# Altium PCB round-small.PcbDoc
Units mm, origin at the board's own origin, x right, y up, seen from the top; angles counter-clockwise.
Board outline 11 x 11 mm, 2 copper layers (Top Layer, Bottom Layer); 25 components, 17 nets, 63 pads, 14 vias.
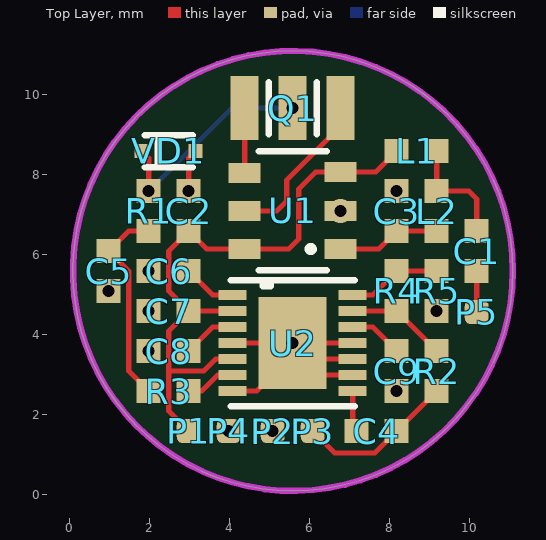
[diagram p0: Top Layer view]
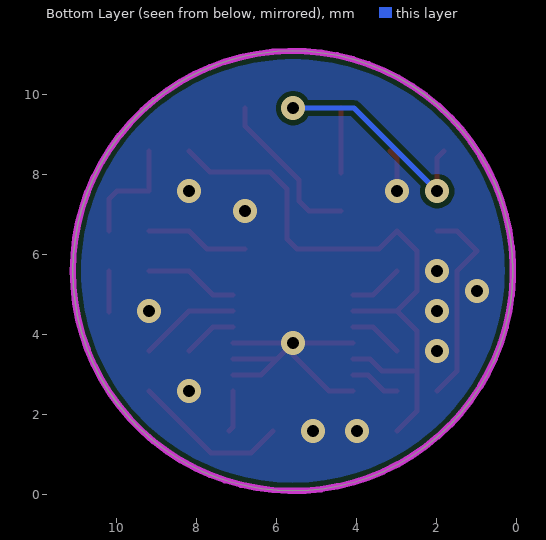
[diagram p1: Bottom Layer view, seen from below]

## Layer stack, top to bottom
Top Solder: solder mask 0.0102, Solder Resist, Dk 3.5
Top Layer: signal copper 0.0356
Dielectric 1: dielectric 0.32, FR-4, Dk 4.8
Bottom Layer: signal copper 0.0356
Bottom Solder: solder mask 0.0102, Solder Resist, Dk 3.5

## Board outline
5.58,0.08 cw(c5.58,5.58) 0.08,5.58 cw(c5.58,5.58) 5.58,11.08 cw(c5.58,5.58) 11.08,5.58 cw(c5.58,5.58)

## Design rules (kind name [scope] priority, off if disabled: settings)
Clearance [All] p1: gap=0.127 ignorepadtopadclearanceinfootprint=FALSE except(0: Arc-Hole Track-Hole SMDPad-Hole THPad-Hole Via-Hole Fill-Hole Poly-Hole Region-Hole Text-Hole)
ComponentClearance [All] p1: gap=0.01 collisioncheckmode=3 verticalgap=0.01 showdistances=FALSE
HoleSize [All] p1: absolutevalues=TRUE maxlimit=6.3 minlimit=0.2 maxpercent=80.000 minpercent=20.000
MinimumSolderMaskSliver [All] p1: minsoldermaskwidth=0.01
PolygonConnect [All] p1: connectstyle=Direct reliefconductorwidth=0.254 reliefentries=4 polygonreliefangle="90 Angle" airgapwidth=0.254
RoutingCorners [All] p1: cornerstyle=90-Degree minsetback=2.54 maxsetback=2.54
RoutingTopology [All] p1: topology=Horizontal
RoutingVias [All] p1: holewidth=0.2 width=0.5 viastyle="Through Hole" minholewidth=0.2 minwidth=0.45 maxholewidth=6.3 maxwidth=6.35
SilkToSilkClearance [All] p1: silktosilkclearance=0.1
SilkToSolderMaskClearance [IsPad] p1: minsilkscreentomaskgap=0.1 clearancetoexposedcopper=TRUE
SolderMaskExpansion [All] p1: expansion=0.102 istentingtop=FALSE
Width [All] p1: maxlimit=10 minlimit=0.089 preferedwidth=0.25 minimp=50.000000 maximp=50.000000 favimp=50.000000
23 further rules are at their usual default settings.

## Components (designator, comment, footprint, x,y, rotation, side; value= is the part's Value field where it differs from the comment)
C1 "10 p" 0402 10.175,6.575 r270 top
C2 "1 µ" 0402 2.975,7.575 r270 top
C3 "4.7 p" 0402 8.175,7.575 r270 top
C4 "0.1 µ" 0402 7.175,1.575 r0 top
C5 "0.1 µ" 0402 0.975,5.075 r90 top
C6 "0.1 µ" 0402 1.975,5.575 r0 top
C7 "1 µ" 0402 1.975,4.575 r0 top
C8 "2.2 µ" 0402 1.975,3.575 r0 top
C9 "0.47 µ" 0402 8.175,2.575 r90 top
L1 "22 n" 0402 8.175,8.575 r0 top
L2 "4.7 n" 0402 9.175,6.575 r90 top
P1 "1-Signal" 1-SignalSmall 2.975,1.575 r0 top
P2 "1-Signal" 1-SignalSmall 5.075,1.575 r0 top
P3 "1-Signal" 1-SignalSmall 6.075,1.575 r0 top
P4 "1-Signal" 1-SignalSmall 3.975,1.575 r0 top
P5 "1-Signal" 1-SignalSmall 10.175,4.55 r0 top
Q1 "R0 ceramic resonator" R0 4.375,9.65 r0 top
R1 "27 k" 0402 1.975,7.575 r270 top
R2 "2.21 k" 0402 9.175,3.575 r270 top
R3 "150" 0402 2.975,2.575 r180 top
R4 "150 k" 0402 8.175,5.575 r270 top
R5 "100 k" 0402 9.175,4.575 r90 top
U1 "MICRF113 ASK transmitter" SOT23-6 6.775,6.125 r180 top
U2 "MAX9814ETD" SON40P300X300X80-15N 5.575,3.775 r0 top
VD1 "BBY65" SC79 3.15,8.575 r90 top

## Footprints (in the part's own frame and the unit in brackets; to place one, negate y for a bottom-side part, rotate by r counter-clockwise, add the part's x,y. Pads: shape width x height; smd on the part's side, far side on the other; paste and mask are expansions set on the pad)
1-SignalSmall [mm]
  rrect50% 0.6x0.6 smd paste-1: 1(0,0)
0402 [mm]
  rect 0.6x0.6 smd: 1(0,0) 2(1,0)
R0 [mm]
  rect 0.7x1.6 smd paste-1: 1(0,0) 2(1.2,0) 3(2.4,0)
  silkscreen extent 0.6,-0.65 1.8,0.65
SC79 [mm]
  rect 0.35x0.35 smd paste-1: 1(0,0) 2(0,1.35)
  silkscreen extent -0.4,0.07 0.4,1.27
SON40P300X300X80-15N [mm]
  rect 0.7x0.25 smd paste-1: 1(-1.5,1.2) 2(-1.5,0.8) 3(-1.5,0.4) 4(-1.5,0) 5(-1.5,-0.4) 6(-1.5,-0.8) 7(-1.5,-1.2) 8(1.5,-1.2) 9(1.5,-0.8) 10(1.5,-0.4) 11(1.5,0) 12(1.5,0.4) 13(1.5,0.8) 14(1.5,1.2)
  rect 1.7x2.3 smd paste-1: 15(0,0)
  silkscreen extent -1.55,-1.58 1.55,1.58
SOT23-6 [mm]
  rect 0.8x0.5 smd paste-1: 1(0,0) 2(0,-0.95) 3(0,-1.925) 4(2.4,-1.9) 5(2.4,-0.95) 6(2.4,0)
  silkscreen extent 0.35,-2.45 2.05,0.53

## Part data
C1 C2 C3 C4 C5 C6 C7 C8 C9: library part Cap
L1 L2: library part Ind
Q1: library part "R0 resonator"
R1 R2 R3 R4 R5: library part Res
U1: library part MICRF113

## Via types
v1: diameter 0.6, hole 0.3, Top Layer to Bottom Layer, tented both sides, 14 vias

## Nets (pads, with @x,y where several pads share a name; then routed paths per layer and width w, separated by ;. In a path a pad name is that pad's centre, name@x,y a point inside that pad or via, vN(x,y) a via of type N, cw(c..) or ccw(c..) an arc to the next point about the centre after c; other vN are vias at no path point)
Ant: C1.2 P5.1 | length 1
  Top Layer w0.13: P5.1 C1.2
GND: C2.1 C3.1 C5.1 C6.1 C7.1 C8.1 C9.1 P2.1 P4.1 R5.1 U1.2 U2.4 U2.7 U2.9 U2.10 U2.11 U2.15 VD1.1 | length 9.2
  Top Layer w0.13: v1(2.975,7.575) 2.975,8.4 VD1.1 ; U2.7 4.675,2.575 5.575,3.475 v1(5.575,3.775) ; U2.4 v1(5.575,3.775) ; U2.9 6.375,2.975 U2.15@5.975,3.375 ; U2.10 U2.15@5.975,3.375 ; U2.11 v1(5.575,3.775) ; v1(5.575,3.775) U2.15@5.975,3.375
  other v1: 3.975,1.575 5.075,1.575 8.175,2.575 1.975,3.575 1.975,4.575 9.175,4.575 0.975,5.075 1.975,5.575 6.775,7.075 8.175,7.575
Mic: C4.2 P3.1 R2.2 | length 4
  Top Layer w0.13: P3.1 6.625,1.025 7.625,1.025 C4.2 R2.2
NetC1_1: C1.1 L1.2 L2.2 | length 2.9
  Top Layer w0.13: L1.2 L2.2 9.975,7.575 10.175,7.375 C1.1
NetC3_2: C3.2 L2.1 U1.1 | length 2.6
  Top Layer w0.13: U1.1 7.725,6.125 C3.2 L2.1
NetC4_1: C4.1 U2.8 | length 1
  Top Layer w0.13: U2.8 7.075,1.675 C4.1
NetC5_2: C5.2 R1.2 R3.2 | length 5.1
  Top Layer w0.13: R3.2 1.475,3.075 1.475,5.575 C5.2 1.475,6.575 R1.2
NetC6_2: C6.2 U2.1 | length 1.3
  Top Layer w0.13: C6.2 3.575,4.975 U2.1
NetC8_2: C8.2 U2.3 | length 1.3
  Top Layer w0.13: C8.2 3.575,4.175 U2.3
NetC9_2: C9.2 U2.12 | length 1.3
  Top Layer w0.13: U2.12 7.575,4.175 C9.2
NetQ1_1: Q1.1 U1.4 | length 1.6
  Top Layer w0.13: U1.4 Q1.1
NetQ1_2: Q1.2 R1.1 VD1.2 | length 5.5
  Top Layer w0.13: VD1.2 1.975,8.4 ; v1(1.975,7.575) 1.975,8.375
  Bottom Layer w0.13: v1(1.975,7.575) 4.05,9.65 v1(5.575,9.65)
NetQ1_3: Q1.3 U1.5 | length 4
  Top Layer w0.13: U1.5 5.175,7.075 5.425,7.325 5.425,7.85 6.775,9.2 Q1.3
NetR2_1: R2.1 R4.2 U2.13 | length 2.5
  Top Layer w0.13: U2.13 R4.2 R2.1
NetR3_1: R3.1 U2.6 | length 1.3
  Top Layer w0.13: R3.1 3.3,2.575 3.7,2.975 U2.6
NetR4_1: R4.1 R5.2 U2.14 | length 2.3
  Top Layer w0.13: U2.14 7.575,4.975 R4.1 R5.2
VIN: C2.2 C7.2 L1.1 P1.1 U1.3 U1.6 U2.2 U2.5 | length 15.8
  Top Layer w0.13: P1.1 2.475,2.075 2.475,3.075 ; U2.5 3.65,3.375 3.35,3.075 2.475,3.075 ; U2.2 C7.2 ; L1.1 7.65,8.05 U1.3 6.15,8.05 5.725,7.625 5.725,6.375 5.475,6.125 U1.6 3.425,6.125 C2.2 2.475,6.075 2.475,5.075 C7.2 ; 2.475,3.075 2.475,4.075 C7.2

## Polygon pours and split planes (outlines as drawn)
GND on Bottom Layer "GND_L02_P001" (solid, pour order 1): 5.58,0.08 cw(c5.58,5.58) 0.08,5.58 cw(c5.58,5.58) 5.58,11.08 cw(c5.58,5.58) 11.08,5.58 cw(c5.58,5.58)

## Keep-outs
Keep-Out Layer:
  circle w0.16: c5.58,5.58 r5.5